# Altium PCB PAM 8403 PCB.PcbDoc
Units mil, origin at the board's own origin, x right, y up, seen from the top; angles counter-clockwise.
Board outline 2500 x 2500 mil, 2 copper layers (Top Layer, Bottom Layer); 18 components, 15 nets, 46 pads, 0 vias.
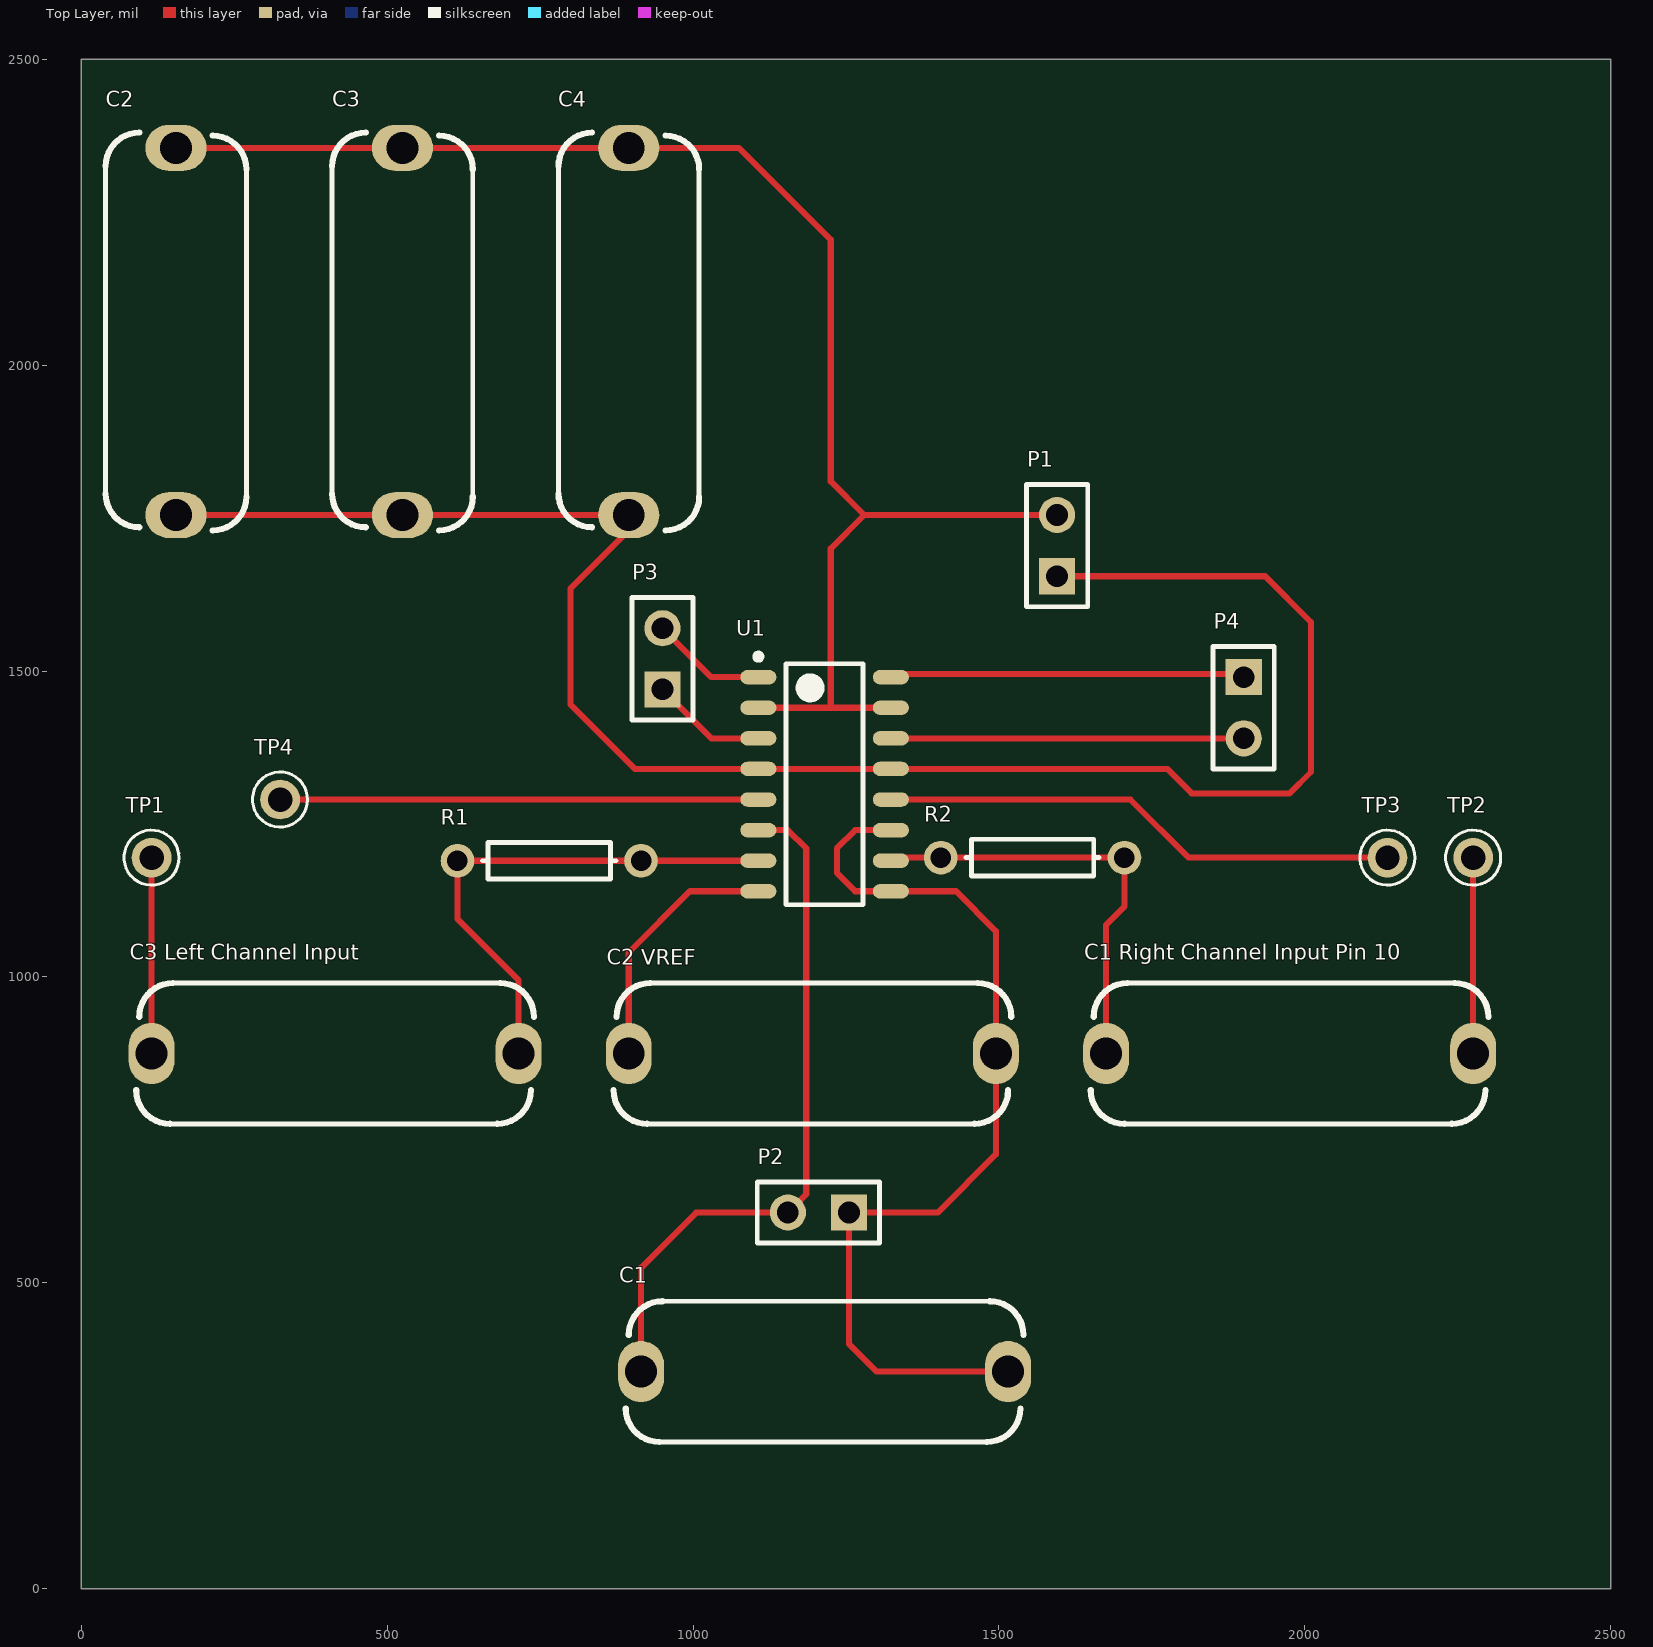
[diagram p0: Top Layer view]
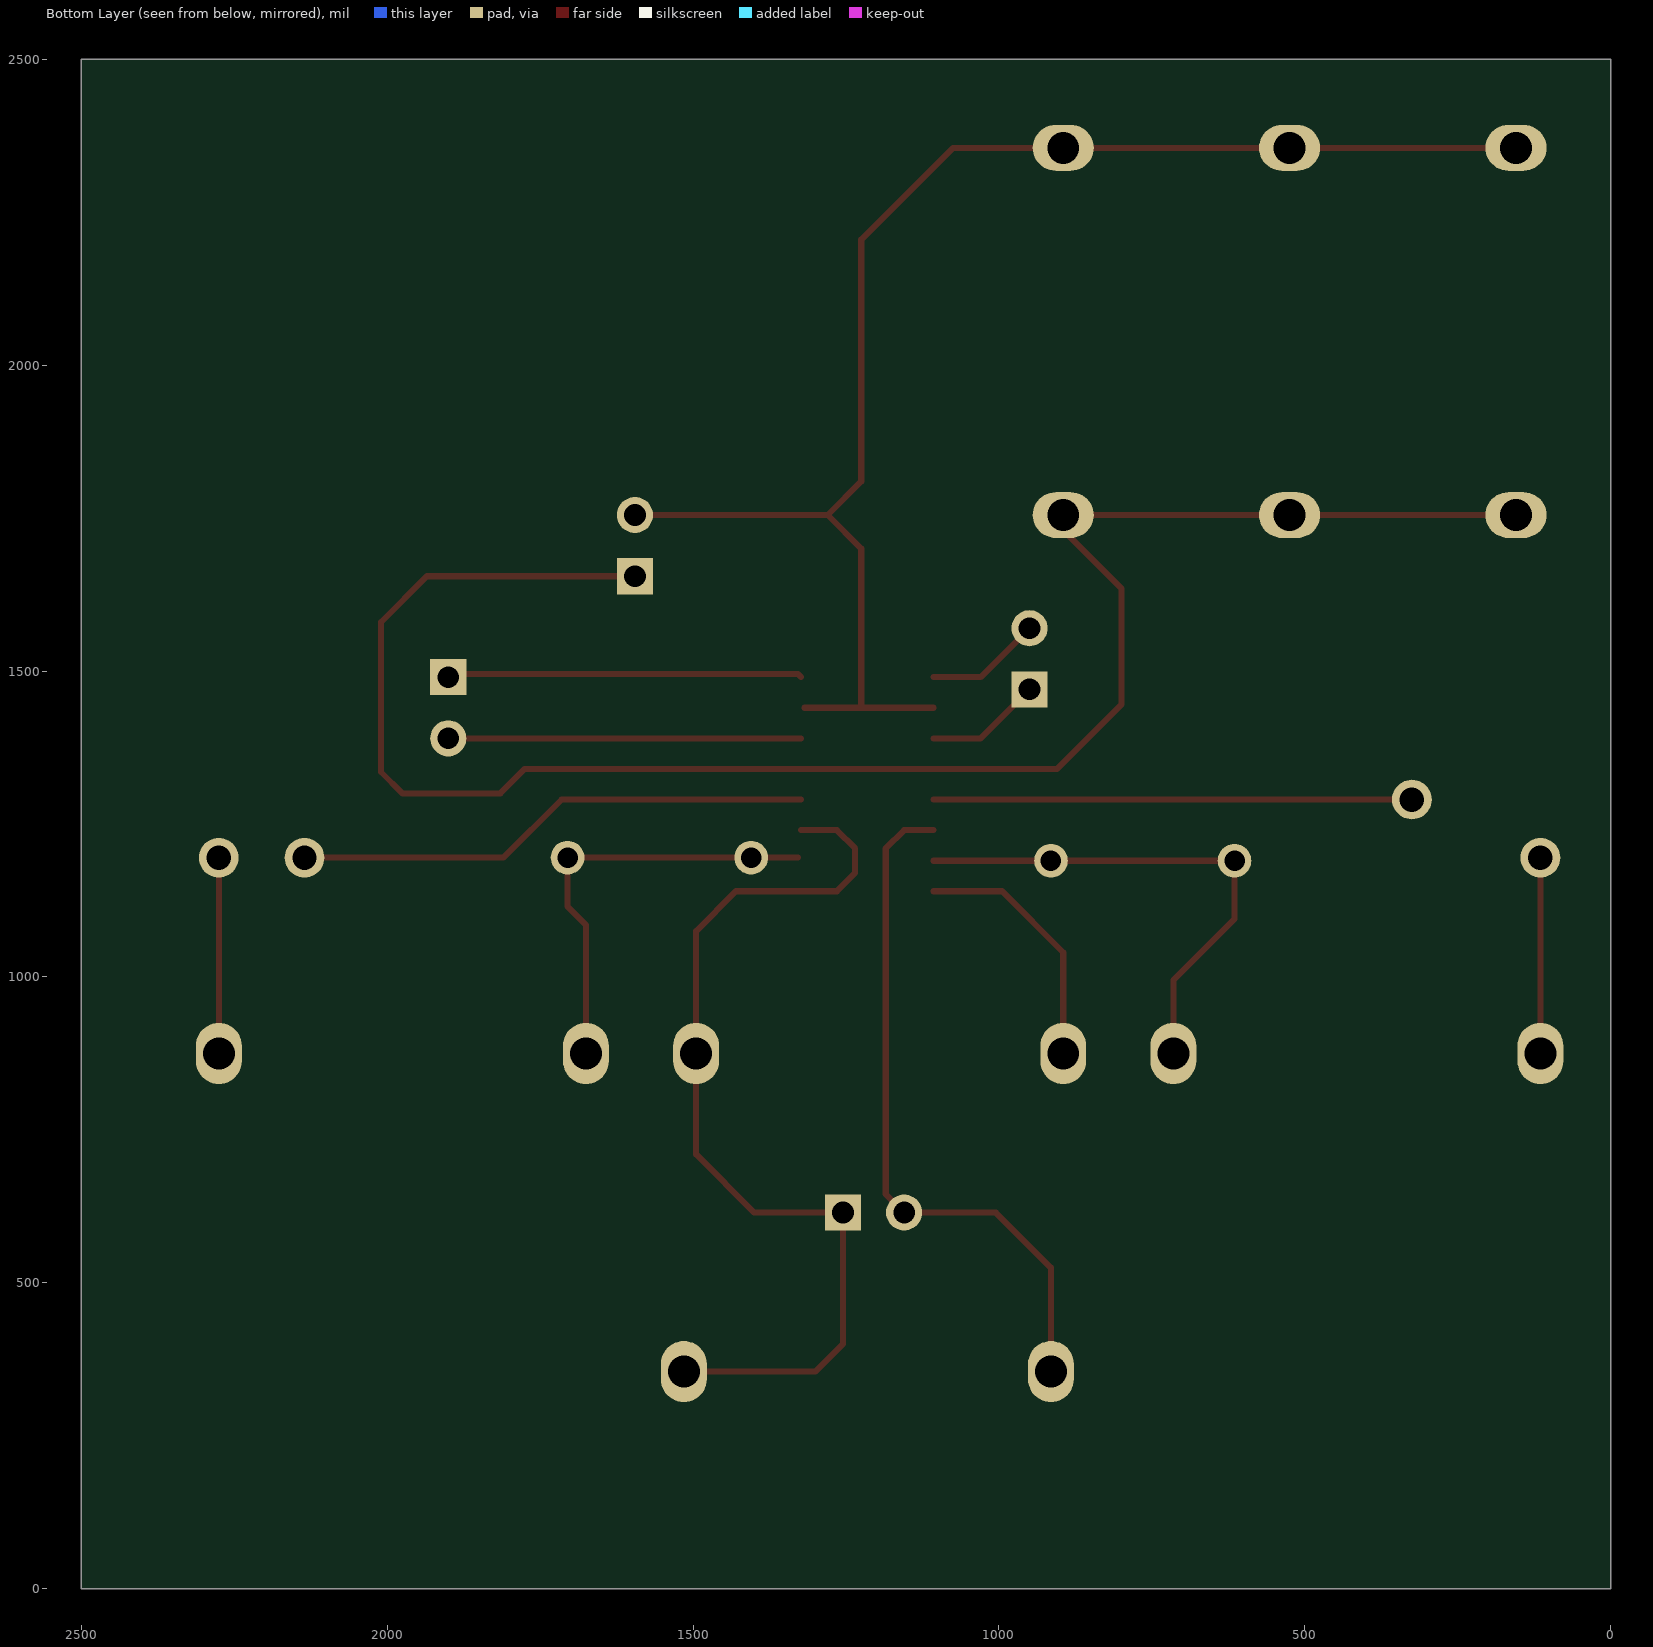
[diagram p1: Bottom Layer view, seen from below]

## Layer stack, top to bottom
Top Solder: solder mask 0.4, Solder Resist, Dk 3.5
Top Layer: signal copper 1.4
Dielectric 1: dielectric 12.6, FR-4, Dk 4.8
Bottom Layer: signal copper 1.4
Bottom Solder: solder mask 0.4, Solder Resist, Dk 3.5

## Board outline
0,0 2500,0 2500,2500 0,2500

## Design rules (kind name [scope] priority, off if disabled: settings)
Clearance [All] p1: gap=10
PolygonConnect [All] p1: connectstyle=Relief reliefconductorwidth=10 reliefentries=4 polygonreliefangle="90 Angle" airgapwidth=10
RoomDefinition "PAM 8403 Breakout Board" [InComponentClass('PAM 8403 Breakout Board')] p1: confinementstyle=ConfineIn formatcopy=TRUE lockcomponents=FALSE outline -15,210 2385,210 2385,2410 -15,2410
RoutingVias [All] p1: holewidth=28 width=50 viastyle="Through Hole" minholewidth=28 minwidth=50 maxholewidth=28 maxwidth=50
SolderMaskExpansion [All] p1: expansion=4
Width [All] p1: maxlimit=10 minlimit=10 preferedwidth=10
30 further rules are at their usual default settings.

## Components (designator, comment, footprint, x,y, rotation, side; value= is the part's Value field where it differs from the comment)
C1 "Cap" "Rad .6" 1215,355 r180 top
"C1 Right Channel Input Pin 10" "Cap" "Rad .6" 1975,875 r0 top
C2 "Cap" "Rad .6" 155,2055 r90 top
"C2 VREF" "Cap" "Rad .6" 1195,875 r0 top
C3 "Cap" "Rad .6" 525,2055 r90 top
"C3 Left Channel Input" "Cap" "Rad .6" 415,875 r180 top
C4 "Cap" "Rad .6" 895,2055 r90 top
P1 "Header 2" HDR1X2 1595,1655 r90 top
P2 "Header 2" HDR1X2 1255,615 r180 top
P3 "Header 2" HDR1X2 950,1470 r90 top
P4 "Header 2" HDR1X2 1900,1490 r270 top
R1 "Res1" AXIAL-0.3 765,1190 r0 top
R2 "Res1" AXIAL-0.3 1555,1195 r180 top
TP1 "TESTPOINT" "THROUGH HOLE TP" 115,1195 r0 top
TP2 "TESTPOINT" "THROUGH HOLE TP" 2275,1195 r0 top
TP3 "TESTPOINT" "THROUGH HOLE TP" 2135,1195 r0 top
TP4 "TESTPOINT" "THROUGH HOLE TP" 325,1290 r0 top
U1 "PAM8403" SOP127P600X175-16N 1215,1315 r0 top

## Footprints (in the part's own frame and the unit in brackets; to place one, negate y for a bottom-side part, rotate by r counter-clockwise, add the part's x,y. Pads: shape width x height; smd on the part's side, far side on the other; paste and mask are expansions set on the pad)
AXIAL-0.3 [mm] "Axial Device, Thru-Hole; 2 Leads; 0.3 in Pin Spacing"
  round 1.4 hole 0.85: 1(-3.81,0) 2(3.81,0)
  silkscreen extent -2.77,-0.76 2.77,0.76
HDR1X2 [mm] "Connector; Header; 2 Position"
  rect 1.5x1.5 hole 0.9: 1(0,0)
  round 1.5 hole 0.9: 2(2.54,0)
  silkscreen extent -1.27,-1.27 3.81,1.27
"Rad .6" [mil] "Radial"
  oval 75x100 hole 52: 1(-300,0) 2(300,0)
  silkscreen extent -325,-115 325,115
SOP127P600X175-16N [mm] "SOP, 16-Leads, Body 9.90x3.90mm, Pitch 1.27mm, IPC Medium Density"
  oval 1.5x0.6 smd: 1(-2.75,4.445) 2(-2.75,3.175) 3(-2.75,1.905) 4(-2.75,0.635) 5(-2.75,-0.635) 6(-2.75,-1.905) 7(-2.75,-3.175) 8(-2.75,-4.445) 9(2.75,-4.445) 10(2.75,-3.175) 11(2.75,-1.905) 12(2.75,-0.635) 13(2.75,0.635) 14(2.75,1.905) 15(2.75,3.175) 16(2.75,4.445)
  silkscreen extent -2.87,-5 1.6,5.42, body extent -2,-5 2,5, height 1.75
"THROUGH HOLE TP" [mil]
  round 65 hole 40: 1(0,0)
  silkscreen extent -45,-45 45,45

## Part data
C1 "C1 Right Channel Input Pin 10" C2 "C2 VREF" C3 "C3 Left Channel Input" C4: "Capacitor"
P1 P2 P3 P4: "Header, 2-Pin"
R1 R2: "Resistor"
TP1 TP2 TP3 TP4: library part TESTPOINT_2, "Through Hole Test Point"
U1: "PAM8403 Ausio Amplifier"

## Nets (pads, with @x,y where several pads share a name; then routed paths per layer and width w, separated by ;. In a path a pad name is that pad's centre, name@x,y a point inside that pad or via, vN(x,y) a via of type N, cw(c..) or ccw(c..) an arc to the next point about the centre after c; other vN are vias at no path point)
"NetC1 Right Channel Input Pin 10_1": "C1 Right Channel Input Pin 10.1" R2.1 R2.2 U1.10 | length 709.2
  Top Layer w10: U1.10@1328.27,1195 R2.2 R2.1 1705,1115 1675,1085 1675,875
"NetC1 Right Channel Input Pin 10_2": "C1 Right Channel Input Pin 10.2" TP2.1 | length 320
  Top Layer w10: 2275,875 TP2.1
NetC1_1: "C2 VREF.2" C1.1 P2.1 U1.9 U1.11 | length 1578
  Top Layer w10: U1.11 1265,1240 1235,1210 1235,1170 1265,1140 U1.9 1430,1140 1495,1075 1495,875 1495,710 1400,615 P2.1 1255,400 1300,355 C1.1
NetC1_2: C1.2 P2.2 U1.6 | length 1145.4
  Top Layer w10: C1.2 915,525 1005,615 P2.2 1185,645 1185,1210 1155,1240 U1.6
"NetC2 VREF_1": "C2 VREF.1" U1.8 | length 418.2
  Top Layer w10: 895,875 895,1040 995,1140 1022.93,1140 1078.8,1140 U1.8
NetC2_1: C2.1 C3.1 C4.1 P1.1 U1.4 U1.13 | length 3065
  Top Layer w10: C2.1 C3.1 C4.1 895,1730 800,1635 800,1445 905,1340 U1.4 U1.13 1775,1340 1815,1300 1975,1300 2010,1335 2010,1580 1935,1655 P1.1
NetC2_2: C2.2 C3.2 C4.2 P1.2 U1.2 U1.15 | length 2468.6
  Top Layer w10: C2.2 C3.2 C4.2 1075,2355 1225,2205 1225,1810 1280,1755 ; U1.2 U1.15@1317.64,1440 ; 1225,1440 1225,1700 1280,1755 ; P1.2 1280,1755
"NetC3 Left Channel Input_1": "C3 Left Channel Input.1" R1.1 R1.2 U1.7 | length 848.2
  Top Layer w10: 715,875 715,995 615,1095 R1.1 R1.2 U1.7
"NetC3 Left Channel Input_2": "C3 Left Channel Input.2" TP1.1 | length 320
  Top Layer w10: 115,875 TP1.1
NetP3_1: P3.1 U1.3 | length 189.9
  Top Layer w10: P3.1 1030,1390 U1.3
NetP3_2: P3.2 U1.1 | length 189.9
  Top Layer w10: P3.2 1030,1490 U1.1
NetP4_1: P4.1 U1.16 | length 593.8
  Top Layer w10: U1.16 1328.27,1495 P4.1@1915,1495
NetP4_2: P4.2 U1.14 | length 593.8
  Top Layer w10: U1.14 1910,1390 P4.2@1915,1395
NetTP3_1: TP3.1 U1.12 | length 851.1
  Top Layer w10: U1.12 1715,1290 1810,1195 TP3.1
NetTP4_1: TP4.1 U1.5 | length 781.7
  Top Layer w10: TP4.1 U1.5

## Silkscreen, mask and mechanical layers (free items; w line width, h text height)
Mechanical 1:
  lines w10: 0,0 2500,0 2500,2480 0,2480 0,0